# EAGLE board HaHub (EAGLE 7.3.0)
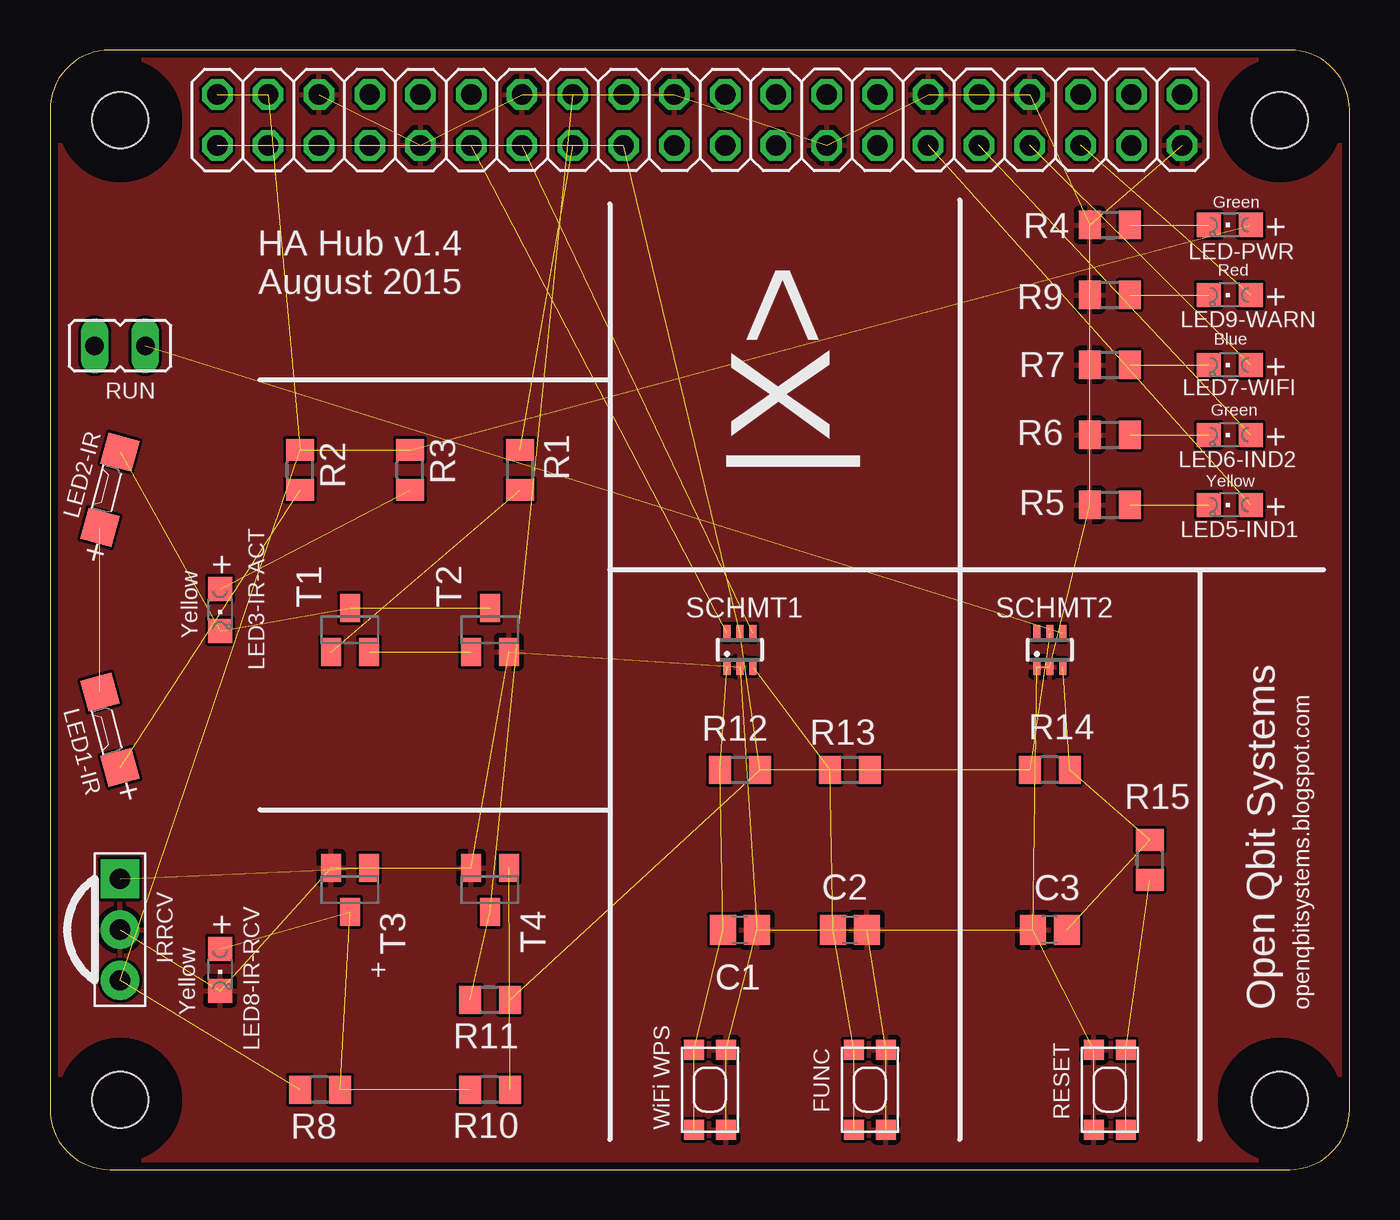
[diagram p0: board, top side]
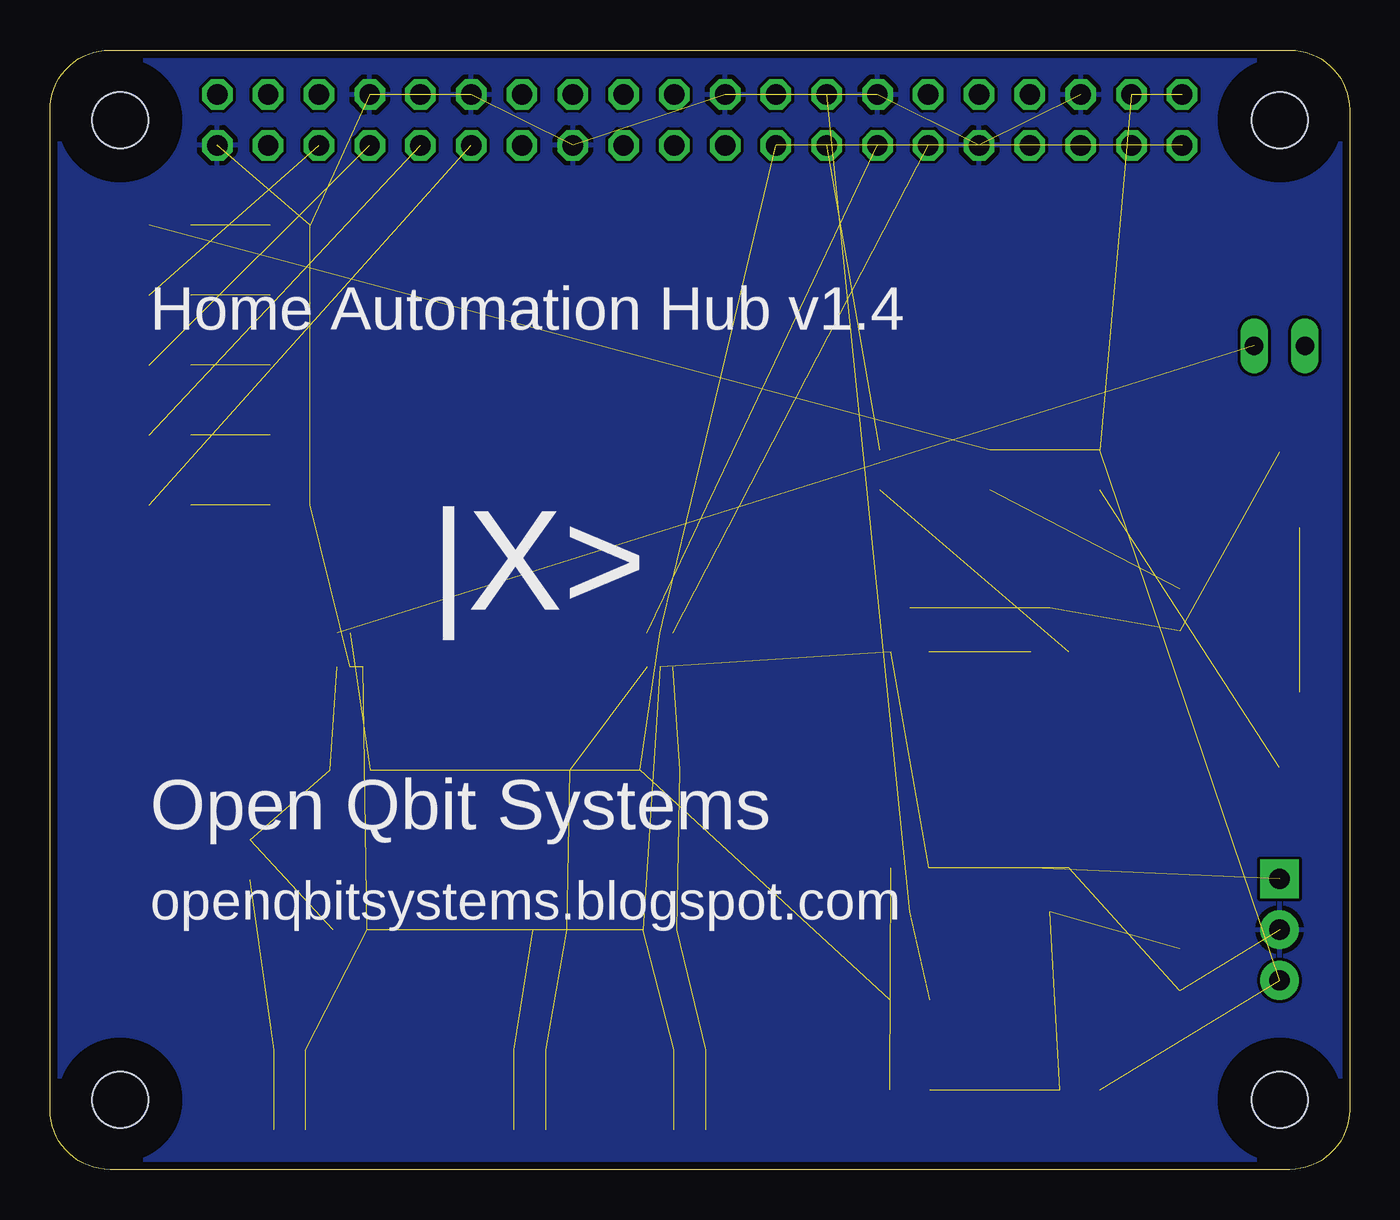
[diagram p1: board, bottom side, seen from below]

Size 65 x 56 mm. Coordinates in mm from the lower left corner, seen from the top.
Outline: 0,3 arc90 3,0 62,0 arc90 65,3 65,53 arc90 62,56 3,56 arc90 0,53 0,3
Copper layers (1*16): Top 0.0356mm / dielectric 1.5011mm / Bottom 0.0356mm
Design rules "OSHParkDesignRules *": minimum track width 6mil, minimum drill 13mil, track to track 6mil, track to pad 6mil, pad to pad 6mil, via to via 6mil, smd to smd 6mil, copper to edge 15mil, drill to drill 6mil, minimum pad ring 7mil, minimum via ring 7mil, stop-mask expansion 3mil, vias tented up to drill 100mil, thermal gap 10mil
Holes 2.8 mm at 3.5,3.5 3.5,52.5 61.5,52.5 61.5,3.5
tRestrict: area 1.9,51 to 5,54; area 60,51 to 63,54; area 60,1.9 to 63,5; area 1.9,1.9 to 5,5
bRestrict: area 1.9,1.9 to 5,5; area 1.9,51 to 5,54; area 60,1.9 to 63,5; area 60,51 to 63,54

## Footprints (pad centres in the part's own frame; a part is rotated, then mirrored left to right if it is on the bottom)
C0805 = smd 1.3 x 1.5: 1 -0.85,0; 2 0.85,0
2X20 = drill 1.016 octagon: 1 -24.13,-1.27; 2 -24.13,1.27; 3 -21.59,-1.27; 4 -21.59,1.27; 5 -19.05,-1.27; 6 -19.05,1.27; 7 -16.51,-1.27; 8 -16.51,1.27; 9 -13.97,-1.27; 10 -13.97,1.27; 11 -11.43,-1.27; 12 -11.43,1.27; 13 -8.89,-1.27; 14 -8.89,1.27; 15 -6.35,-1.27; 16 -6.35,1.27; 17 -3.81,-1.27; 18 -3.81,1.27; 19 -1.27,-1.27; 20 -1.27,1.27; 21 1.27,-1.27; 22 1.27,1.27; 23 3.81,-1.27; 24 3.81,1.27; 25 6.35,-1.27; 26 6.35,1.27; 27 8.89,-1.27; 28 8.89,1.27; 29 11.43,-1.27; 30 11.43,1.27; 31 13.97,-1.27; 32 13.97,1.27; 33 16.51,-1.27; 34 16.51,1.27; 35 19.05,-1.27; 36 19.05,1.27; 37 21.59,-1.27; 38 21.59,1.27; 39 24.13,-1.27; 40 24.13,1.27
PNA460XM = drill 1.016 pad 1.93 square: 1 -2.54,0 | drill 1.016 pad 1.93: 2 0,0; 3 2.54,0
MICRO-SIDELED = smd 1.6 x 1.6: A 0,1.95; C 0,-1.95
CHIPLED_0805 = smd 1.2 x 1.2: A 0,-1.05; C 0,1.05
R0805 = smd 1.1 x 1.4: 1 -1,0; 2 1,0
JP1 = drill 0.914 long: 1 0,-1.27; 2 0,1.27
SC-70-6L = smd 0.35 x 0.8: 1 -0.65,-0.85; 2 0,-0.85; 3 0.65,-0.85; 4 0.65,0.85; 5 0,0.85; 6 -0.65,0.85
KMR2 = smd 1 x 1: 1 2,0.8; 2 2,-0.8; 3 -2,0.8; 4 -2,-0.8
SOT23-BEC = smd 1 x 1.4: B -0.95,-1.1; C 0,1.1; E 0.95,-1.1

## Placement (x,y rotation side)
C1  1uF  [C0805]  34.5,12 0 top
C2  1uF  [C0805]  40,12 0 top
C3  1uF  [C0805]  50,12 180 top
HDR1  2x20  [2X20]  32.5,52.5 0 top
IRRCV  PNA460XM  [PNA460XM]  3.5,12 270 top
LED1-IR  IR  [MICRO-SIDELED]  3,22 195 top
LED2-IR  IR  [MICRO-SIDELED]  3,34 165 top
LED3-IR-ACT  Yellow  [CHIPLED_0805]  8.5,28 180 top
LED5-IND1  Yellow  [CHIPLED_0805]  59,33.25 90 top
LED6-IND2  Green  [CHIPLED_0805]  59,36.75 90 top
LED7-WIFI  Blue  [CHIPLED_0805]  59,40.25 90 top
LED8-IR-RCV  Yellow  [CHIPLED_0805]  8.5,10 180 top
LED9-WARN  Red  [CHIPLED_0805]  59,43.75 90 top
LED-PWR  Green  [CHIPLED_0805]  59,47.25 90 top
R1  1K  [R0805]  23.5,35 270 top
R2  10Ohm  [R0805]  12.5,35 90 top
R3  100Ohm  [R0805]  18,35 90 top
R4  1K  [R0805]  53,47.25 0 top
R5  100Ohm  [R0805]  53,33.25 0 top
R6  100Ohm  [R0805]  53,36.75 0 top
R7  100Ohm  [R0805]  53,40.25 0 top
R8  1K  [R0805]  13.5,4 180 top
R9  100Ohm  [R0805]  53,43.75 0 top
R10  10K  [R0805]  22,4 180 top
R11  1K  [R0805]  22,8.5 0 top
R12  10K  [R0805]  34.5,20 0 top
R13  10K  [R0805]  40,20 0 top
R14  1M  [R0805]  50,20 180 top
R15  100K  [R0805]  55,15.5 270 top
RUN  RST  [JP1]  3.5,41.2 270 top
SCHMT1  74HC2G17-Q100  [SC-70-6L]  34.5,26 0 top
SCHMT2  74HC2G17-Q100  [SC-70-6L]  50,26 0 top
SW1  SPST_TACT-KMR2  [KMR2]  33,4 270 top
SW2  SPST_TACT-KMR2  [KMR2]  41,4 90 top
SW3  SPST_TACT-KMR2  [KMR2]  53,4 90 top
T1  2N4401  [SOT23-BEC]  15,27 0 top
T2  2N4401  [SOT23-BEC]  22,27 0 top
T3  2N4401  [SOT23-BEC]  15,14 180 top
T4  2N4401  [SOT23-BEC]  22,14 180 top

## Library data of the parts
C1-C3 = adafruit; MPN: MC0805B104K160CT; OC_NEWARK: 06R3738
HDR1 SW1-SW3 = adafruit; OC_NEWARK: unknown
IRRCV = adafruit; MPN: TSOP38238; OC_NEWARK: 02P9885
LED1-IR LED2-IR = led; MPN: VSMB2943SLX01; OC_NEWARK: 62W1340
LED3-IR-ACT LED5-IND1 LED8-IR-RCV = led; MPN: 150080YS75000; OC_NEWARK: 95W3804
LED6-IND2 LED-PWR = led; MPN: 150080GS75000; OC_NEWARK: 95W3800
LED7-WIFI = led; MPN: 150080BS75000; OC_NEWARK: 95W3799
LED9-WARN = led; MPN: 150080RS75000; OC_NEWARK: 95W3801
R1 R4 R8 R11 = adafruit; MF: VISHAY/DALE; MPN: CRCW08051K00FKEA; OC_NEWARK: 52K9723
R2 = adafruit; MF: VISHAY/DALE; MPN: CRCW080510R0FKEA; OC_NEWARK: 52K9804
R3 R5-R7 R9 = adafruit; MF: VISHAY/DALE; MPN: CRCW0805100RFKEA; OC_NEWARK: 52K9809
R10 R12 R13 = adafruit; MF: VISHAY/DALE; MPN: CRCW080510K0FKEA; OC_NEWARK: 52K9795
R14 = adafruit; MF: VISHAY/DALE; MPN: CRCW08051M00FKEA; OC_NEWARK: 52K9759
R15 = adafruit; MF: VISHAY/DALE; MPN: CRCW0805100KFKEA; OC_NEWARK: 52K9808
RUN = jumper; MPN: 2211S-02G; OC_NEWARK: 08N6744
SCHMT1 SCHMT2 = varshneya; MPN: 74HC2G17GW,125; OC_NEWARK: 71R2196
T1 T2 = transistor-neu-to92; MPN: MMBT4401-TP; OC_NEWARK: 51T4931
T3 T4 = transistor; MPN: MMBT4401-TP; OC_NEWARK: 51T4931

## Nets
+3V3: HDR1.1 HDR1.17 R11.2 R12.2 R13.2 R14.2 SCHMT1.5 SCHMT2.5
+5V: HDR1.2 HDR1.4 IRRCV.3 LED-PWR.A R2.2 R3.2 R8.2
GND: C1.2 C2.2 C3.2 HDR1.6 HDR1.9 HDR1.14 HDR1.20 HDR1.25 HDR1.30 HDR1.34 HDR1.39 IRRCV.2 LED8-IR-RCV.C R4.1 R5.1 R6.1 R7.1 R9.1 SCHMT1.2 SCHMT2.1 SCHMT2.2 SW1.1 SW1.3 SW2.2 SW2.4 SW3.1 SW3.3 T2.E T3.E T4.E
GPIO02: HDR1.3
GPIO03: HDR1.5
GPIO04: HDR1.7
GPIO05: HDR1.29 LED5-IND1.A
GPIO06: HDR1.31 LED6-IND2.A
GPIO07: HDR1.26
GPIO08: HDR1.24
GPIO09: HDR1.21
GPIO10: HDR1.19
GPIO11: HDR1.23
GPIO12: HDR1.32
GPIO13: HDR1.33 LED7-WIFI.A
GPIO14: HDR1.8
GPIO15: HDR1.10
GPIO16: HDR1.36
GPIO17: HDR1.11 SCHMT1.6
GPIO18: HDR1.12
GPIO19: HDR1.35 LED9-WARN.A
GPIO20: HDR1.38
GPIO21: HDR1.40
GPIO22: HDR1.15 R1.1
GPIO23: HDR1.16 R11.1 T4.C
GPIO25: HDR1.22
GPIO26: HDR1.37
GPIO27: HDR1.13 SCHMT1.4
ID_SC: HDR1.28
ID_SD: HDR1.27
N$1: R15.2 SW3.2 SW3.4
N$2: LED1-IR.A R2.1
N$3: LED1-IR.C LED2-IR.A
N$4: LED2-IR.C LED3-IR-ACT.C T1.C T2.C
N$5: R1.2 T1.B
N$6: LED3-IR-ACT.A R3.1
N$7: LED5-IND1.C R5.2
N$8: IRRCV.1 T3.B
N$9: C1.1 R12.1 SCHMT1.1 SW1.2 SW1.4
N$10: LED8-IR-RCV.A R8.1 R10.2 T3.C
N$11: T1.E T2.B
N$12: C2.1 R13.1 SCHMT1.3 SW2.1 SW2.3
N$13: C3.1 R14.1 R15.1 SCHMT2.3
N$14: LED7-WIFI.C R7.2
N$16: LED9-WARN.C R9.2
N$17: LED6-IND2.C R6.2
N$21: LED-PWR.C R4.2
N$23: R10.1 T4.B
RST: RUN.2 SCHMT2.4

## Tracks (layer width: path | path; a pad name or v marks a point on that pad's centre or on a via)
+3V3  (7 unrouted)
+5V  (6 unrouted)
GND  (29 unrouted)
  pour Bottom: 0,3 arc90 3,0 62,0 arc90 65,3 65,53 arc90 62,56 3,56 arc90 0,53
  pour Top: 0,3 arc90 3,0 62,0 arc90 65,3 65,53 arc90 62,56 3,56 arc90 0,53 0,20.5
GPIO05  (1 unrouted)
GPIO06  (1 unrouted)
GPIO13  (1 unrouted)
GPIO17  (1 unrouted)
GPIO19  (1 unrouted)
GPIO22  (1 unrouted)
GPIO23  (2 unrouted)
GPIO27  (1 unrouted)
N$1  (2 unrouted)
N$2  (1 unrouted)
N$3  (1 unrouted)
N$4  (3 unrouted)
N$5  (1 unrouted)
N$6  (1 unrouted)
N$7  (1 unrouted)
N$8  (1 unrouted)
N$9  (4 unrouted)
N$10  (3 unrouted)
N$11  (1 unrouted)
N$12  (4 unrouted)
N$13  (3 unrouted)
N$14  (1 unrouted)
N$16  (1 unrouted)
N$17  (1 unrouted)
N$21  (1 unrouted)
N$23  (1 unrouted)
RST  (1 unrouted)

## Text on the board
tPlace: +
tNames: HA Hub v1.4 / August 2015 | |X> | Open Qbit Systems | openqbitsystems.blogspot.com | FUNC | WiFi WPS | RESET
bNames: Home Automation Hub v1.4 | |X> | Open Qbit Systems | openqbitsystems.blogspot.com